# EAGLE board HAP-5xMosFet-1.0 (EAGLE 4.16)
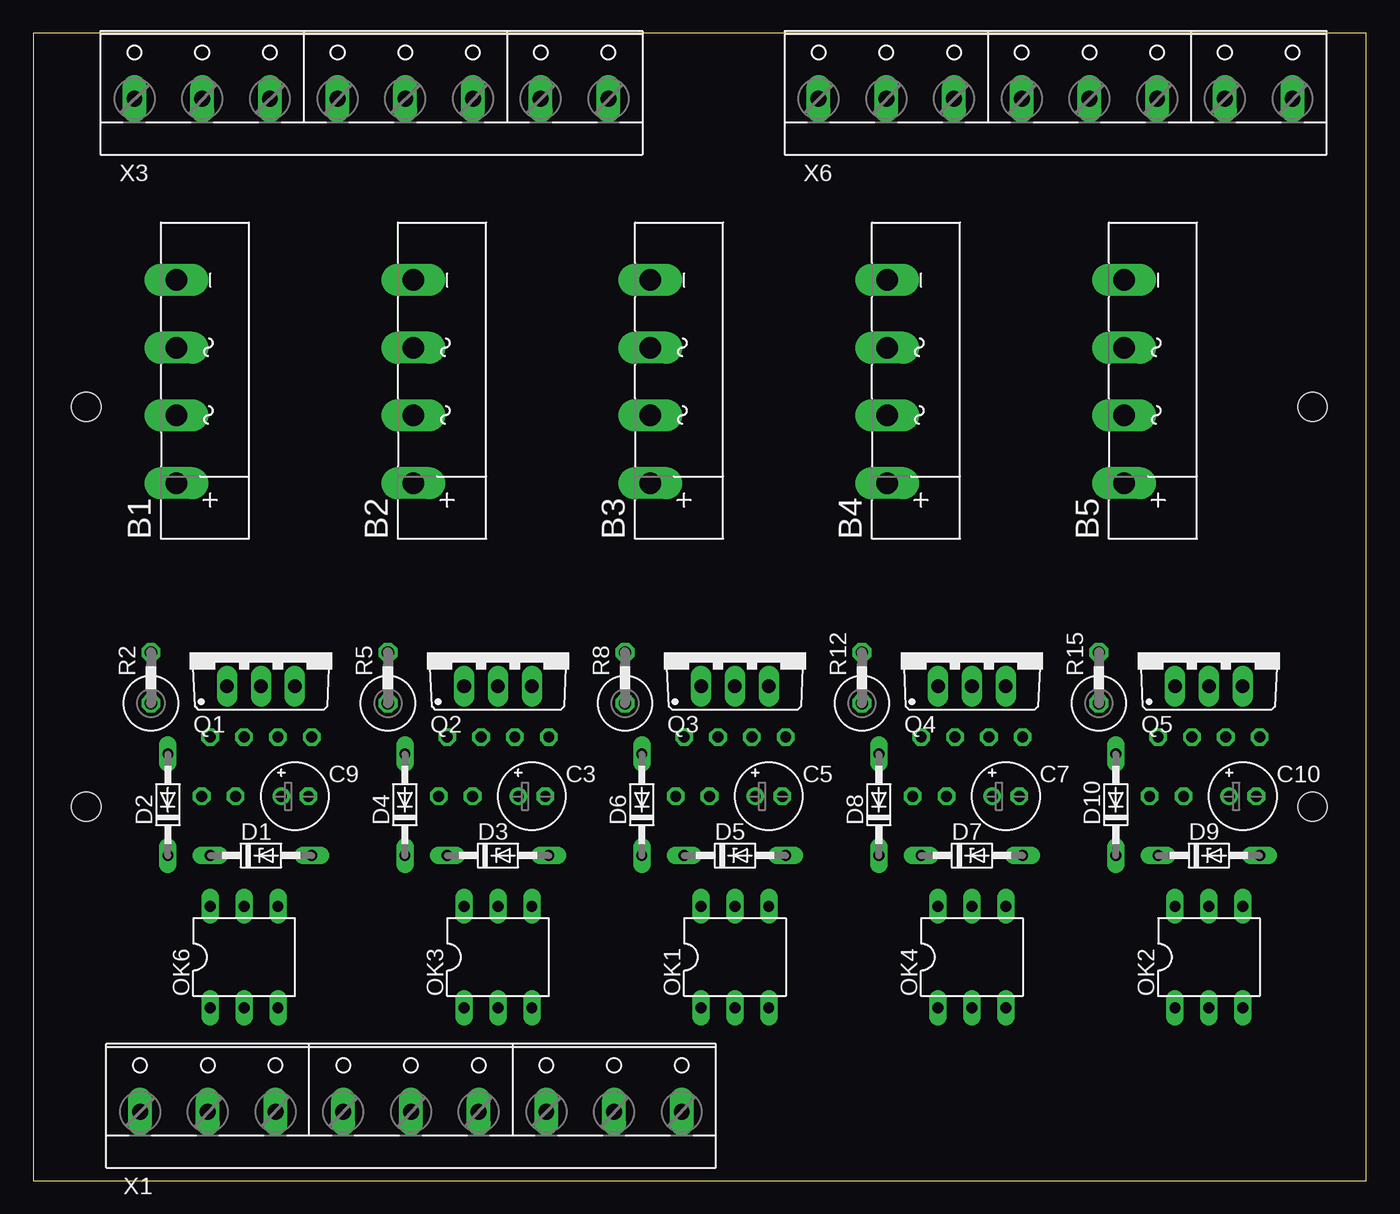
[diagram p0: board, top side]
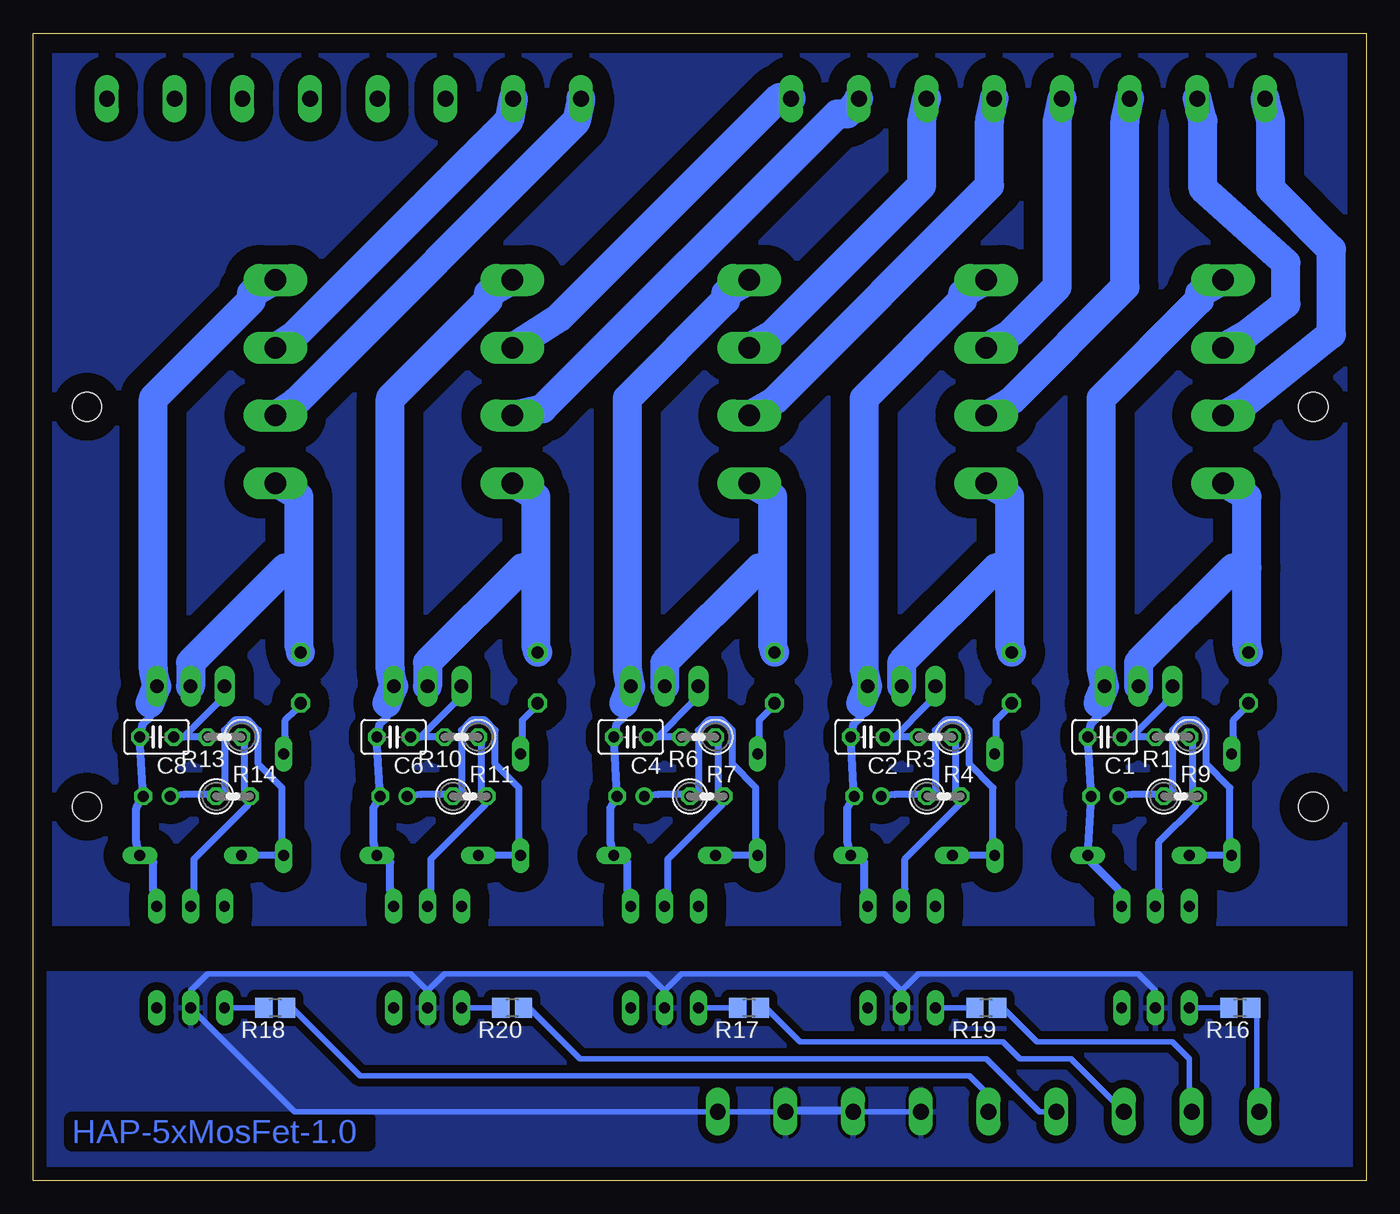
[diagram p1: board, bottom side, seen from below]

Size 100 x 86.08 mm. Coordinates in mm from the lower left corner, seen from the top.
Outline: 100,0 100,86.08 0,86.08 0,0 100,0
Copper layers (1*16): Top 0.035mm / dielectric 1.5mm / Bottom 0.035mm
Design rules "default": minimum track width 10mil, minimum drill 24mil, track to track 8mil, track to pad 8mil, pad to pad 8mil, via to via 8mil, smd to smd 8mil, copper to edge 40mil, drill to drill 8mil, minimum pad ring 10mil, minimum via ring 8mil, stop-mask expansion 4mil, vias tented up to drill 0mil, thermal gap 10mil
Net classes: 1 Mains: width 2.184 mm, drill 0.508 mm; 2 Medium: width 0.508 mm, drill 0.254 mm
Holes 2.2 mm at 3.97,28.05 3.97,58.06 95.98,58.05 95.97,28.05

## Footprints (pad centres in the part's own frame; a part is rotated, then mirrored left to right if it is on the bottom)
KBU = drill 1.6 long: + -7.62,2.54; - 7.62,2.54; AC1 -2.54,2.54; AC2 2.54,2.54
C025-025X050 = drill 0.813 octagon: 1 -1.27,0; 2 1.27,0
E2-5 = drill 0.813 pad 1.27 round: + -1.016,0 | drill 0.813 pad 1.27 octagon: - 1.016,0
DO34Z7 = drill 0.813 long: A 3.81,0; C -3.81,0
DO34-7 = drill 0.813 long: A 3.81,0; C -3.81,0
DIL06 = drill 0.813 long: 1 -2.54,-3.81; 2 0,-3.81; 3 2.54,-3.81; 4 2.54,3.81; 5 0,3.81; 6 -2.54,3.81
TO220BV = drill 1.016 long: D 0,-2.54; G -2.54,-2.54; S 2.54,-2.54
0207/2V = drill 0.813 octagon: 1 -1.27,0; 2 1.27,0
0411V = drill 0.914 octagon: 1 -2.54,0; 2 1.27,0
R0805 = smd 1.3 x 1.5: 1 -0.85,0; 2 0.85,0
W237-9P = drill 1.194 long: 1 -20.32,-0.635; 2 -15.24,-0.635; 3 -10.16,-0.635; 4 -5.08,-0.635; 5 0,-0.635; 6 5.08,-0.635; 7 10.16,-0.635; 8 15.24,-0.635; 9 20.32,-0.635
W237-8P = drill 1.194 long: 1 -17.78,-0.635; 2 -12.7,-0.635; 3 -7.62,-0.635; 4 -2.54,-0.635; 5 2.54,-0.635; 6 7.62,-0.635; 7 12.7,-0.635; 8 17.78,-0.635

## Placement (x,y rotation side)
B1  KBU8K,600V  [KBU]  13.27,59.95 90 top
B2  KBU8K,600V  [KBU]  31.05,59.95 90 top
B3  KBU8K,600V  [KBU]  48.83,59.95 90 top
B4  KBU8K,600V  [KBU]  66.61,59.95 90 top
B5  KBU8K,600V  [KBU]  84.39,59.95 90 top
C1  4n7  [C025-025X050]  19.62,33.28 180 bottom
C2  4n7  [C025-025X050]  37.4,33.28 180 bottom
C3  0.47y/63V  [E2-5]  37.4,28.84 0 top
C4  4n7  [C025-025X050]  55.18,33.28 180 bottom
C5  0.47y/63V  [E2-5]  55.18,28.84 0 top
C6  4n7  [C025-025X050]  72.96,33.28 180 bottom
C7  0.47y/63V  [E2-5]  72.96,28.84 0 top
C8  4n7  [C025-025X050]  90.74,33.28 180 bottom
C9  0.47y/63V  [E2-5]  19.62,28.84 0 top
C10  0.47y/63V  [E2-5]  90.74,28.84 0 top
D1  10V,1W3  [DO34Z7]  17.08,24.39 0 top
D2  1N4148  [DO34-7]  10.09,28.2 90 top
D3  10V,1W3  [DO34Z7]  34.86,24.39 0 top
D4  1N4148  [DO34-7]  27.88,28.2 90 top
D5  10V,1W3  [DO34Z7]  52.64,24.39 0 top
D6  1N4148  [DO34-7]  45.66,28.2 90 top
D7  10V,1W3  [DO34Z7]  70.42,24.39 0 top
D8  1N4148  [DO34-7]  63.44,28.2 90 top
D9  10V,1W3  [DO34Z7]  88.2,24.39 0 top
D10  1N4148  [DO34-7]  81.22,28.2 90 top
OK1  CNY17  [DIL06]  52.64,16.77 0 top
OK2  CNY17  [DIL06]  88.2,16.77 0 top
OK3  CNY17  [DIL06]  34.86,16.77 0 top
OK4  CNY17  [DIL06]  70.42,16.77 0 top
OK6  CNY17  [DIL06]  15.81,16.77 0 top
Q1  IRFB9N65A  [TO220BV]  17.08,39.63 0 top
Q2  IRFB9N65A  [TO220BV]  34.86,39.63 0 top
Q3  IRFB9N65A  [TO220BV]  52.64,39.63 0 top
Q4  IRFB9N65A  [TO220BV]  70.42,39.63 0 top
Q5  IRFB9N65A  [TO220BV]  88.2,39.63 0 top
R1  47k  [0207/2V]  14.54,33.28 180 bottom
R2  68k,2W  [0411V]  8.82,38.36 90 top
R3  47k  [0207/2V]  32.32,33.28 180 bottom
R4  10k  [0207/2V]  31.69,28.84 0 bottom
R5  68k,2W  [0411V]  26.61,38.36 90 top
R6  47k  [0207/2V]  50.1,33.28 180 bottom
R7  10k  [0207/2V]  49.47,28.84 0 bottom
R8  68k,2W  [0411V]  44.38,38.36 90 top
R9  10k  [0207/2V]  13.9,28.84 0 bottom
R10  47k  [0207/2V]  67.88,33.28 180 bottom
R11  10k  [0207/2V]  67.25,28.84 0 bottom
R12  68k,2W  [0411V]  62.17,38.36 90 top
R13  47k  [0207/2V]  85.66,33.28 180 bottom
R14  10k  [0207/2V]  85.03,28.84 0 bottom
R15  68k,2W  [0411V]  79.95,38.36 90 top
R16  470  [R0805]  9.46,12.96 180 bottom
R17  470  [R0805]  46.29,12.96 180 bottom
R18  470  [R0805]  81.85,12.96 180 bottom
R19  470  [R0805]  28.51,12.96 180 bottom
R20  470  [R0805]  64.07,12.96 180 bottom
X1  [W237-9P]  28.33,5.81 0 top
X3  [W237-8P]  25.37,81.81 0 top
X6  [W237-8P]  76.7,81.81 0 top

## Library data of the parts
B1-B5 = rectifier
C1-C10 R1-R20 = rcl
D1-D10 = diode
OK1-OK4 OK6 = optocoupler
Q1-Q5 = transistor-power
X1 X3 X6 = con-wago-508

## Nets
GND: OK1.2 OK2.2 OK3.2 OK4.2 OK6.2 X1.6 X1.7 X1.8
I1: R16.1 X1.1
I2: R19.1 X1.2
I3: R17.1 X1.3
I4: R20.1 X1.4
I5: R18.1 X1.5
N$1 [Medium]: OK6.5 R1.1 R9.2
N$2 [Medium]: C1.1 Q1.G R1.2
N$3 [Medium]: C9.+ D1.C D2.C R9.1
N$4 [Medium]: OK3.5 R3.1 R4.2
N$5 [Medium]: D2.A R2.1
N$6 [Mains]: B1.+ Q1.D R2.2
N$7 [Mains]: B1.AC1 X3.1
N$8 [Mains]: B1.AC2 X3.2
N$9 [Medium]: C2.1 Q2.G R3.2
N$10 [Medium]: C3.+ D3.C D4.C R4.1
N$11 [Medium]: D4.A R5.1
N$12 [Mains]: B2.+ Q2.D R5.2
N$13 [Mains]: B3.AC1 X3.5
N$14 [Mains]: B3.AC2 X3.6
N$15 [Medium]: OK1.5 R6.1 R7.2
N$16 [Medium]: C4.1 Q3.G R6.2
N$17 [Medium]: C5.+ D5.C D6.C R7.1
N$18 [Medium]: D6.A R8.1
N$19 [Mains]: B3.+ Q3.D R8.2
N$20 [Mains]: B5.AC1 X6.1
N$21 [Mains]: B5.AC2 X6.2
N$22 [Medium]: OK4.5 R10.1 R11.2
N$23 [Medium]: C6.1 Q4.G R10.2
N$24 [Medium]: C7.+ D7.C D8.C R11.1
N$25 [Medium]: D8.A R12.1
N$26 [Mains]: B4.+ Q4.D R12.2
N$27 [Mains]: B2.AC1 X3.3
N$28 [Mains]: B2.AC2 X3.4
N$29 [Medium]: OK2.5 R13.1 R14.2
N$30 [Medium]: C8.1 Q5.G R13.2
N$31 [Medium]: C10.+ D9.C D10.C R14.1
N$32 [Medium]: D10.A R15.1
N$33 [Mains]: B5.+ Q5.D R15.2
N$34 [Mains]: B4.AC1 X3.7
N$35 [Mains]: B4.AC2 X3.8
N$36: OK6.1 R16.2
N$37: OK1.1 R17.2
N$38: OK2.1 R18.2
N$39 [Mains]: B1.- C1.2 C9.- D1.A OK6.4 Q1.S
N$40 [Mains]: B3.- C4.2 C5.- D5.A OK1.4 Q3.S
N$41 [Mains]: B5.- C8.2 C10.- D9.A OK2.4 Q5.S
N$42 [Mains]: B2.- C2.2 C3.- D3.A OK3.4 Q2.S
N$43: OK3.1 R19.2
N$44 [Mains]: B4.- C6.2 C7.- D7.A OK4.4 Q4.S
N$45: OK4.1 R20.2

## Tracks (layer width: path | path; a pad name or v marks a point on that pad's centre or on a via)
GND
  Bottom 0.406: 70.42,14.23 71.69,15.5 86.93,15.5 88.2,14.23 OK2.2 80.41,5.17 X1.6 X1.7 | 70.42,14.23 OK4.2 | 70.42,14.23 69.15,15.5 53.91,15.5 52.64,14.23 | 52.64,14.23 51.37,15.5 36.13,15.5 34.86,14.23 | 34.86,14.23 33.59,15.5 17.08,15.5 15.81,14.23 OK6.2 | X1.7 | X1.7 38.67,5.34 43.75,5.34 X1.8 | 34.86,14.23 OK3.2 | 52.64,14.23 OK1.2
  pour Bottom (isolate 0.61): 0.57,15.5 99.63,15.5 99.63,0.26 0.57,0.26
I1
  Bottom 0.406: R16.1 8.19,12.96 8.19,5.17 X1.1
I2
  Bottom 0.406: X1.2 13.27,5.17 13.27,9.15 14.54,10.42 24.7,10.42 27.24,12.96 R19.1
I3
  Bottom 0.406: X1.3 22.16,9.15 25.97,9.15 27.24,10.42 42.48,10.42 45.02,12.96 R17.1
I4
  Bottom 0.406: X1.4 24.53,5.17 28.51,9.15 58.99,9.15 62.8,12.96 R20.1
I5
  Bottom 0.406: X1.5 28.33,6.43 29.78,7.88 75.5,7.88 80.58,12.96 R18.1
N$1
  Bottom 0.508: OK6.5 15.56,21.85 15.56,25.41 12.76,28.2 R9.2 13.02,29.22 13.02,32.77 R1.1
N$2
  Bottom 0.508: R1.2 17.59,33.28 | 17.59,33.28 C1.1 | 17.59,33.28 15.05,35.82 Q1.G
N$3
  Bottom 0.508: D1.C D2.C 10.22,25.66 10.22,29.47 12,31.25 12,33.79 12.76,34.55 13.78,34.55 14.54,33.79 14.54,28.96 R9.1 15.81,28.96 17.59,28.96 C9.+
N$4
  Bottom 0.508: OK3.5 34.61,21.85 34.61,24.14 30.54,28.2 R4.2 30.8,29.22 30.8,32.77 R3.1
N$5
  Bottom 0.508: D2.A 9.97,33.28 9.97,34.55 9.21,35.31 R2.1
N$6
  Bottom 2.184: 8.95,45.98 8.95,51.31 B1.+ | 8.95,45.98 8.95,40.14 R2.2 | Q1.D 17.08,38.87 9.97,45.98 8.95,45.98
N$7
  Bottom 2.184: X3.1 7.17,79.51 7.17,74.43 2.6,69.86 2.6,63.51 8.95,58.43 B1.AC1
N$8
  Bottom 2.184: X3.2 12.25,79.51 12.25,74.43 6.03,68.84 6.03,65.79 8.95,63.51 B1.AC2
N$9
  Bottom 0.508: R3.2 35.37,33.28 | 35.37,33.28 C2.1 | 35.37,33.28 32.83,35.82 Q2.G
N$10
  Bottom 0.508: D3.C D4.C 28,25.66 28,29.47 29.78,31.25 29.78,33.79 30.54,34.55 31.56,34.55 32.32,33.79 32.32,28.96 R4.1 33.59,28.96 35.37,28.96 C3.+
N$11
  Bottom 0.508: D4.A 27.75,33.28 27.75,34.55 26.99,35.31 R5.1
N$12
  Bottom 2.184: 26.73,45.98 26.73,51.31 B2.+ | 26.73,45.98 26.73,40.14 R5.2 | Q2.D 34.86,38.87 27.75,45.98 26.73,45.98
N$13
  Bottom 2.184: X3.5 28.26,79.51 28.26,74.68 44.51,58.43 B3.AC1
N$14
  Bottom 2.184: X3.6 33.34,79.51 33.34,74.68 44.51,63.51 B3.AC2
N$15
  Bottom 0.508: OK1.5 52.39,21.85 52.39,24.14 48.32,28.2 R7.2 48.58,29.22 48.58,32.77 R6.1
N$16
  Bottom 0.508: R6.2 53.15,33.28 | 53.15,33.28 C4.1 | 53.15,33.28 50.61,35.82 Q3.G
N$17
  Bottom 0.508: D5.C D6.C 45.78,25.66 45.78,29.47 47.56,31.25 47.56,33.79 48.32,34.55 49.34,34.55 50.1,33.79 50.1,28.96 R7.1 51.37,28.96 53.15,28.96 C5.+
N$18
  Bottom 0.508: D6.A 45.53,33.28 45.53,34.55 44.77,35.31 R8.1
N$19
  Bottom 2.184: 44.51,45.98 44.51,51.31 B3.+ | 44.51,45.98 44.51,40.14 R8.2 | Q3.D 52.64,38.87 45.53,45.98 44.51,45.98
N$20
  Bottom 2.184: X6.1 59.24,79.51 80.33,58.43 B5.AC1
N$21
  Bottom 2.184: X6.2 64.32,79.51 80.33,63.51 B5.AC2
N$22
  Bottom 0.508: OK4.5 70.17,21.85 70.17,24.14 66.1,28.2 R11.2 66.36,29.22 66.36,32.77 R10.1
N$23
  Bottom 0.508: R10.2 70.93,33.28 | 70.93,33.28 C6.1 | 70.93,33.28 68.39,35.82 Q4.G
N$24
  Bottom 0.508: D7.C D8.C 63.56,25.66 63.56,29.47 65.34,31.25 65.34,33.79 66.1,34.55 67.12,34.55 67.88,33.79 67.88,28.96 R11.1 69.15,28.96 70.93,28.96 C7.+
N$25
  Bottom 0.508: D8.A 63.31,33.28 63.31,34.55 62.55,35.31 R12.1
N$26
  Bottom 2.184: 62.29,45.98 62.29,51.31 B4.+ | 62.29,45.98 62.29,40.14 R12.2 | Q4.D 70.42,38.87 63.31,45.98 62.29,45.98
N$27
  Bottom 2.184: X3.3 18.1,79.51 18.1,67.06 26.73,58.43 B2.AC1
N$28
  Bottom 2.184: X3.4 23.18,79.51 23.18,67.06 26.73,63.51 B2.AC2
N$29
  Bottom 0.508: OK2.5 87.95,21.85 87.95,24.14 83.88,28.2 R14.2 84.14,29.22 84.14,32.77 R13.1
N$30
  Bottom 0.508: R13.2 88.71,33.28 | 88.71,33.28 C8.1 | 88.71,33.28 86.17,35.82 Q5.G
N$31
  Bottom 0.508: D9.C D10.C 81.34,25.66 81.34,29.47 83.12,31.25 83.12,33.79 83.88,34.55 84.9,34.55 85.66,33.79 85.66,28.96 R14.1 86.93,28.96 88.71,28.96 C10.+
N$32
  Bottom 0.508: D10.A 81.09,33.28 81.09,34.55 80.33,35.31 R15.1
N$33
  Bottom 2.184: 80.07,45.98 80.07,51.31 B5.+ | 80.07,45.98 80.07,40.14 R15.2 | Q5.D 88.2,38.87 81.09,45.98 80.07,45.98
N$34
  Bottom 2.184: X3.7 38.92,80.02 39.69,80.02 61.78,57.92 B4.AC1
N$35
  Bottom 2.184: X3.8 44,81.29 60.51,64.78 B4.AC2
N$36
  Bottom 0.406: R16.2 OK6.1
N$37
  Bottom 0.406: R17.2 OK1.1
N$38
  Bottom 0.406: R18.2 OK2.1
N$39
  Bottom 0.61: OK6.4 18.6,21.85 20.64,23.88 D1.A C9.- C1.2 20.64,34.3 20.13,34.8 20.13,35.82
  Bottom 2.184: 20.13,35.82 Q1.S 19.87,38.36 19.87,58.68 12.51,66.05 12.51,66.55 B1.-
N$40
  Bottom 0.61: OK1.4 55.43,21.85 55.43,23.88 D5.A 56.7,25.41 56.7,27.95 C5.- C4.2 56.2,34.3 55.69,34.8 55.69,35.82
  Bottom 2.184: 55.69,35.82 Q3.S 55.43,38.36 55.43,58.68 48.07,66.05 48.07,66.55 B3.-
N$41
  Bottom 0.61: OK2.4 90.99,21.85 90.99,23.88 D9.A 92.26,25.41 92.26,27.95 C10.- C8.2 91.76,34.3 91.25,34.8 91.25,35.82
  Bottom 2.184: 91.25,35.82 Q5.S 90.99,38.36 90.99,58.68 83.63,66.05 83.63,66.55 B5.-
N$42
  Bottom 0.61: OK3.4 37.65,21.85 37.65,23.88 D3.A 38.92,25.41 38.92,27.95 C3.- C2.2 38.42,34.3 37.91,34.8 37.91,35.82
  Bottom 2.184: 37.91,35.82 Q2.S 37.65,38.36 37.65,58.68 30.29,66.05 30.29,66.55 B2.-
N$43
  Bottom 0.406: R19.2 OK3.1
N$44
  Bottom 0.61: OK4.4 73.21,21.85 73.21,23.88 D7.A 74.48,25.41 74.48,27.95 C7.- C6.2 73.98,34.3 73.47,34.8 73.47,35.82
  Bottom 2.184: 73.47,35.82 Q4.S 73.21,38.36 73.21,58.68 65.85,66.05 65.85,66.55 B4.-
N$45
  Bottom 0.406: R20.2 OK4.1
N$46
  pour Bottom (isolate 1.422): 0.57,85.35 99.63,85.35 99.63,19.31 0.57,19.31

## Text on the board
Bottom: HAP-5xMosFet-1.0